# EAGLE board sensor (EAGLE 8.5.0)
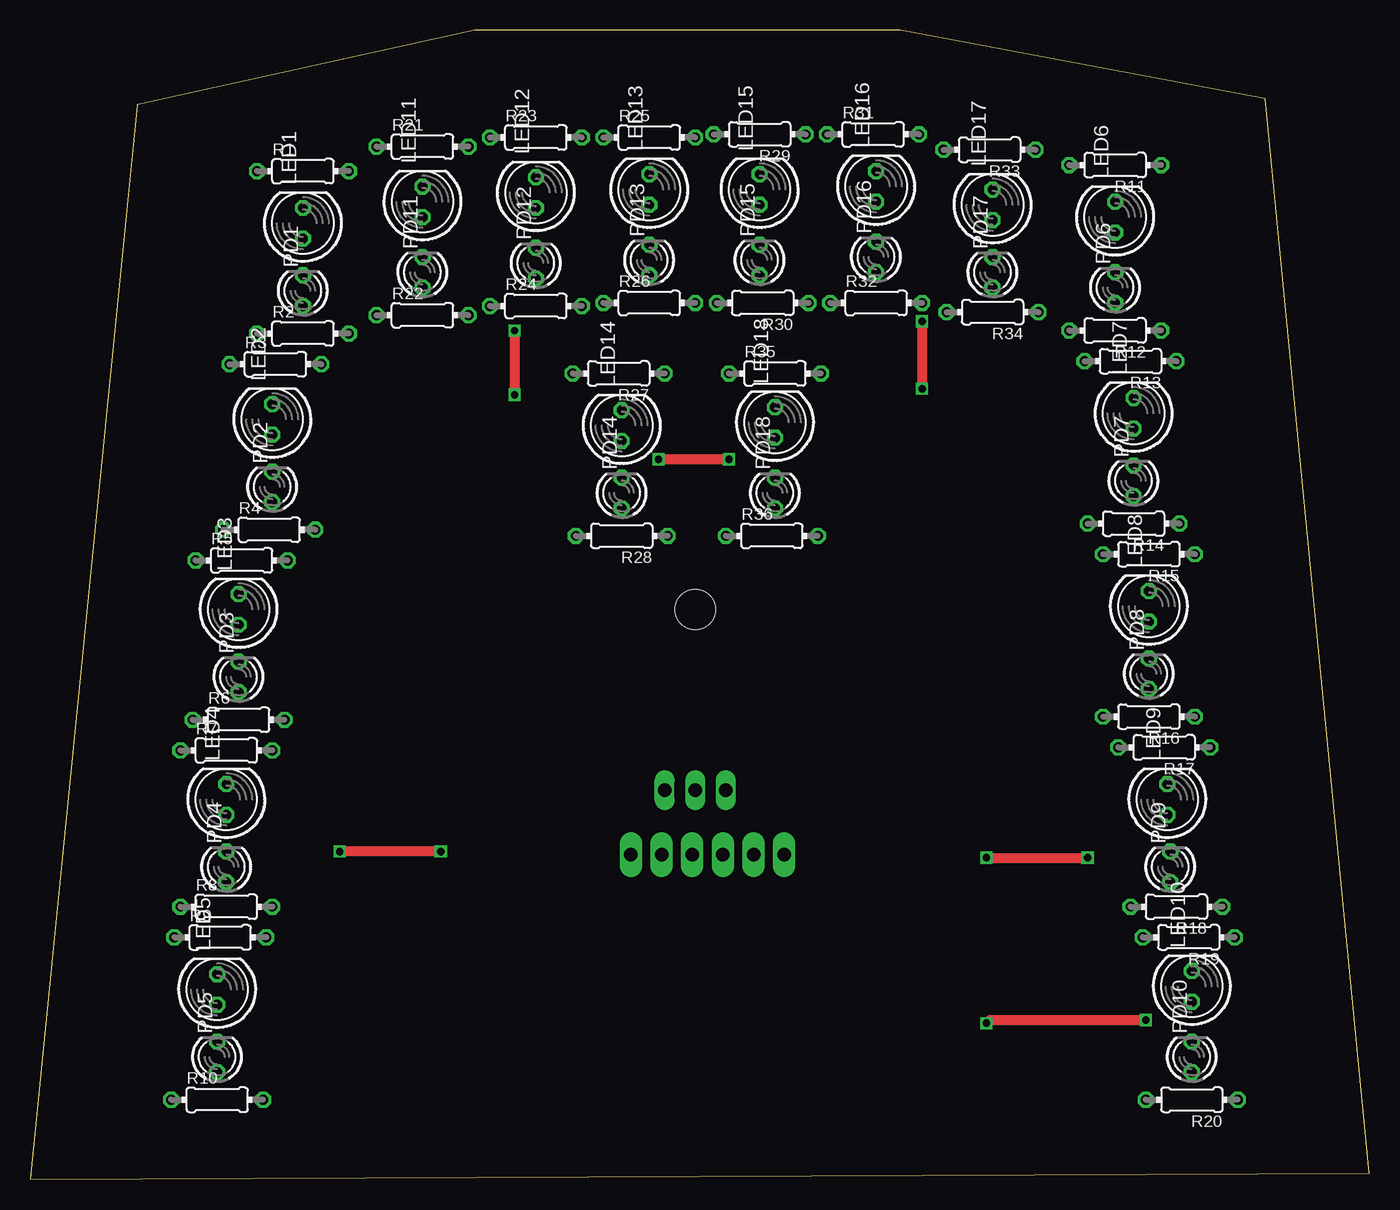
[diagram p0: board, top side]
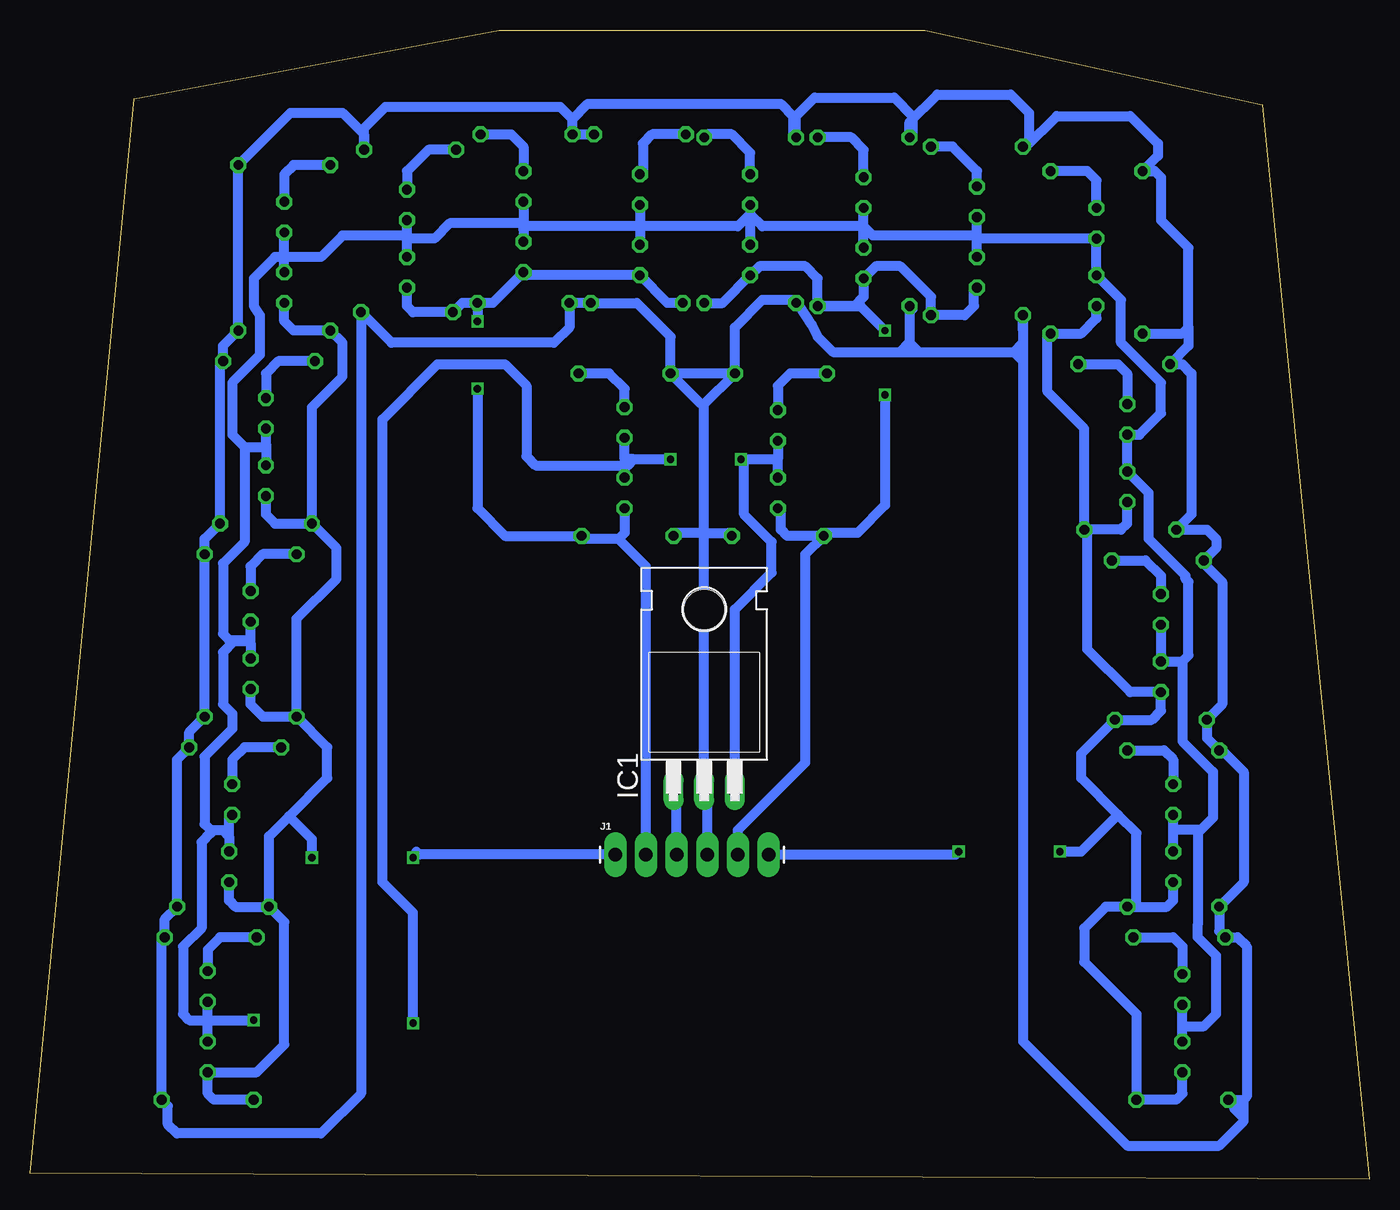
[diagram p1: board, bottom side, seen from below]

Size 110.98 x 95.25 mm. Coordinates in mm from the lower left corner, seen from the top.
Outline: 0,0 110.98,0.51 102.34,89.59 72.14,95.25 36.83,95.25 8.89,89.08 0,0
Copper layers (1*16): Top 0.035mm / dielectric 1.5mm / Bottom 0.035mm
Design rules "default": minimum track width 6mil, minimum drill 0.35mm, track to track 6mil, track to pad 6mil, pad to pad 6mil, via to via 6mil, smd to smd 6mil, copper to edge 40mil, drill to drill 6mil, minimum pad ring 10mil, minimum via ring 8mil, stop-mask expansion 4mil, vias tented up to drill 0mil, thermal gap 10mil

## Footprints (pad centres in the part's own frame; a part is rotated, then mirrored left to right if it is on the bottom)
TO220H = drill 1.118 long: 1 -2.54,-10.16; 2 0,-10.16; 3 2.54,-10.16 | hole 3.302: 0,4.826
1X06_LONGPADS = drill 1.118 pad 1.88 long: 1 0,0; 2 2.54,0; 3 5.08,0; 4 7.62,0; 5 10.16,0; 6 12.7,0
LED5MM = drill 0.813 octagon: A -1.27,0; K 1.27,0
LED3MM = drill 0.813 octagon: A -1.27,0; K 1.27,0
0204/7 = drill 0.813 octagon: 1 -3.81,0; 2 3.81,0

## Placement (x,y rotation side)
IC1  7805T  [TO220H]  55.12,42.42 0 bottom
J1  [1X06_LONGPADS]  62.48,26.92 0 bottom
LED1  [LED5MM]  22.61,79.25 90 top
LED2  [LED5MM]  20.07,62.99 90 top
LED3  [LED5MM]  17.27,47.24 90 top
LED4  [LED5MM]  16.26,31.5 90 top
LED5  [LED5MM]  15.49,15.75 90 top
LED6  [LED5MM]  89.92,79.76 90 top
LED7  [LED5MM]  91.44,63.5 90 top
LED8  [LED5MM]  92.71,47.5 90 top
LED9  [LED5MM]  94.23,31.5 90 top
LED10  [LED5MM]  96.27,16 90 top
LED11  [LED5MM]  32.51,81.03 90 top
LED12  [LED5MM]  41.91,81.79 90 top
LED13  [LED5MM]  51.31,82.04 90 top
LED14  [LED5MM]  49.02,62.48 90 top
LED15  [LED5MM]  60.45,82.04 90 top
LED16  [LED5MM]  70.1,82.3 90 top
LED17  [LED5MM]  79.76,80.77 90 top
LED18  [LED5MM]  61.72,62.74 90 top
PD1  [LED3MM]  22.61,73.66 90 top
PD2  [LED3MM]  20.07,57.4 90 top
PD3  [LED3MM]  17.27,41.66 90 top
PD4  [LED3MM]  16.26,25.91 90 top
PD5  [LED3MM]  15.49,10.16 90 top
PD6  [LED3MM]  89.92,73.91 90 top
PD7  [LED3MM]  91.44,57.91 90 top
PD8  [LED3MM]  92.71,41.91 90 top
PD9  [LED3MM]  94.49,25.91 90 top
PD10  [LED3MM]  96.27,10.16 90 top
PD11  [LED3MM]  32.51,75.18 90 top
PD12  [LED3MM]  41.91,75.95 90 top
PD13  [LED3MM]  51.31,76.2 90 top
PD14  [LED3MM]  49.02,56.9 90 top
PD15  [LED3MM]  60.45,76.2 90 top
PD16  [LED3MM]  70.1,76.45 90 top
PD17  [LED3MM]  79.76,75.18 90 top
PD18  [LED3MM]  61.72,56.9 90 top
R1  [0204/7]  22.61,83.57 0 top
R2  [0204/7]  22.61,70.1 0 top
R3  [0204/7]  20.32,67.56 0 top
R4  [0204/7]  19.81,53.85 0 top
R5  [0204/7]  17.53,51.31 0 top
R6  [0204/7]  17.27,38.1 0 top
R7  [0204/7]  16.26,35.56 0 top
R8  [0204/7]  16.26,22.61 0 top
R9  [0204/7]  15.75,20.07 0 top
R10  [0204/7]  15.49,6.6 0 top
R11  [0204/7]  89.92,84.07 180 top
R12  [0204/7]  89.92,70.36 180 top
R13  [0204/7]  91.19,67.82 180 top
R14  [0204/7]  91.44,54.36 180 top
R15  [0204/7]  92.71,51.82 180 top
R16  [0204/7]  92.71,38.35 180 top
R17  [0204/7]  93.98,35.81 180 top
R18  [0204/7]  95,22.61 180 top
R19  [0204/7]  96.01,20.07 180 top
R20  [0204/7]  96.27,6.6 180 top
R21  [0204/7]  32.51,85.6 0 top
R22  [0204/7]  32.51,71.63 0 top
R23  [0204/7]  41.91,86.36 0 top
R24  [0204/7]  41.91,72.39 0 top
R25  [0204/7]  51.31,86.36 0 top
R26  [0204/7]  51.31,72.64 0 top
R27  [0204/7]  48.77,66.8 180 top
R28  [0204/7]  49.02,53.34 180 top
R29  [0204/7]  60.45,86.61 180 top
R30  [0204/7]  60.71,72.64 180 top
R31  [0204/7]  69.85,86.61 0 top
R32  [0204/7]  70.1,72.64 0 top
R33  [0204/7]  79.5,85.34 180 top
R34  [0204/7]  79.76,71.88 180 top
R35  [0204/7]  61.72,66.8 0 top
R36  [0204/7]  61.47,53.34 0 top

## Library data of the parts
IC1 = linear
J1 = SparkFun-Connectors
LED1-LED18 PD1-PD18 = led
R1-R36 = resistor

## Nets
GND: IC1.2 J1.4 R1.1 R2.1 R3.1 R4.1 R5.1 R6.1 R7.1 R8.1 R9.1 R10.1 R11.1 R12.1 R13.1 R14.1 R15.1 R16.1 R17.1 R18.1 R19.1 R20.1 R21.1 R22.1 R23.1 R24.1 R25.1 R26.1 R27.1 R28.1 R29.1 R30.1 R31.1 R32.1 R33.1 R34.1 R35.1 R36.1
KA: J1.2 PD15.A PD16.A PD17.A PD18.A R30.2 R32.2 R34.2 R36.2
KI: J1.5 PD11.A PD12.A PD13.A PD14.A R22.2 R24.2 R26.2 R28.2
N$1: LED1.K R1.2
N$2: LED6.K R11.2
N$3: LED2.K R3.2
N$4: LED7.K R13.2
N$5: LED3.K R5.2
N$6: LED8.K R15.2
N$7: LED4.K R7.2
N$8: LED9.K R17.2
N$9: LED5.K R9.2
N$11: LED10.K R19.2
N$13: LED11.K R21.2
N$14: LED12.K R23.2
N$15: LED13.K R25.2
N$16: LED14.K R27.2
N$18: LED15.K R29.2
N$19: LED16.K R31.2
N$20: LED17.K R33.2
N$21: LED18.K R35.2
SKA: J1.1 PD6.A PD7.A PD8.A PD9.A PD10.A R12.2 R14.2 R16.2 R18.2 R20.2
SKI: J1.6 PD1.A PD2.A PD3.A PD4.A PD5.A R2.2 R4.2 R6.2 R8.2 R10.2
VCC: IC1.3 LED1.A LED2.A LED3.A LED4.A LED5.A LED6.A LED7.A LED8.A LED9.A LED10.A LED11.A LED12.A LED13.A LED14.A LED15.A LED16.A LED17.A LED18.A PD1.K PD2.K PD3.K PD4.K PD5.K PD6.K PD7.K PD8.K PD9.K PD10.K PD11.K PD12.K PD13.K PD14.K PD15.K PD16.K PD17.K PD18.K
VIN: IC1.1 J1.3

## Tracks (layer width: path | path; a pad name or v marks a point on that pad's centre or on a via)
GND
  Bottom 0.813: 55.12,53.59 55.12,64.26 | 55.12,64.26 R27.1 | 55.12,64.26 55.37,64.26 R35.1 | 55.12,53.59 53.09,53.59 R28.1 | 55.12,53.59 57.4,53.59 R36.1 | R27.1 R35.1 | R27.1 52.58,70.61 50.29,72.9 47.75,72.9 R26.1 47.24,72.39 46.23,70.87 45.72,69.85 44.45,68.58 38.86,68.58 | R35.1 57.91,69.85 60.71,72.64 R30.1 R32.1 66.29,70.61 67.56,69.34 81.03,69.34 R34.1 83.57,7.11 86.87,3.81 98.81,3.81 99.57,4.57 99.57,6.1 R20.1 100.08,19.81 R19.1 99.82,21.59 R18.1 98.81,34.8 R17.1 97.79,37.08 R16.1 R15.1 96.52,53.09 R14.1 95.25,67.56 R13.1 95,69.09 R12.1 R11.1 89.41,88.39 85.09,88.39 83.31,86.61 R33.1 83.31,87.12 81.53,88.9 67.06,88.9 66.04,87.88 | R29.1 R31.1 66.04,87.88 | 66.04,87.88 64.77,89.15 48.77,89.15 47.75,88.14 47.75,86.61 R25.1 47.5,88.14 45.97,89.66 39.37,89.66 37.85,88.14 37.85,86.61 R23.1 38.1,87.63 35.81,89.92 29.72,89.92 28.19,88.39 28.19,86.11 R21.1 28.45,85.6 25.91,88.14 19.81,88.14 17.53,85.85 17.53,84.84 R1.1 17.78,83.57 17.27,83.06 17.27,79.5 14.99,77.22 14.99,70.61 | 14.99,70.61 14.99,69.09 R3.1 15.49,67.56 14.73,66.8 14.73,55.12 R4.1 13.46,53.85 12.7,53.09 12.7,52.32 R5.1 13.72,51.05 12.19,49.53 12.19,39.37 R6.1 13.46,36.58 R7.1 12.19,35.56 10.41,33.78 10.41,24.64 R8.1 12.45,20.57 R9.1 10.92,20.07 10.16,19.3 10.16,6.86 10.41,6.6 | R2.1 15.49,70.1 14.99,70.61 | 10.41,6.6 R10.1 11.18,6.1 11.18,5.84 10.41,5.08 | 28.7,70.36 R22.1 28.7,69.34 | 37.85,72.14 R24.1 38.1,69.34 | 28.7,69.34 28.7,68.58 | 28.7,68.58 28.7,67.82 | 28.7,67.82 28.7,11.43 20.07,2.79 12.45,2.79 10.41,4.83 10.41,5.08 | J1.4 54.86,32 IC1.2 55.12,53.59 | 38.86,68.58 37.85,68.58
  Bottom 0.813: 37.85,68.58 37.34,68.58 | 37.34,68.58 29.46,68.58 | 29.46,68.58 28.7,68.58 | 38.1,69.34 38.1,68.83 37.85,68.58 | 29.46,68.58 28.7,69.34 | 29.46,68.58 28.7,67.82 | 38.1,69.34 37.34,68.58 | 38.1,69.34 38.86,68.58 | 10.41,5.08 10.41,6.6
KA  (via drill 0.6)
  Top 0.813: v73.91,71.12 v73.91,65.53
  Bottom 0.813: PD17.A 79.76,72.39 79.25,71.88 R34.2 75.18,72.64 R32.2 | R30.2 58.17,72.64 PD15.A 69.85,74.93 PD16.A 72.64,72.64 R32.2 | PD18.A 61.72,53.59 62.23,53.09 | 62.23,53.09 65.02,53.09 R36.2 71.63,53.34 73.91,55.63 v73.91,65.53 | R32.2 v73.91,71.12 | J1.2 59.94,50.8 62.23,53.09
KI  (via drill 0.6)
  Top 0.813: v40.13,70.36 v40.13,65.02
  Bottom 0.813: PD11.A 32.77,73.66 32.77,72.39 33.53,71.63 R22.2 36.32,73.15 38.86,75.69 40.89,75.69 PD12.A 41.91,73.15 42.67,72.39 R24.2 | R26.2 53.59,72.64 PD13.A 50.55,75.69 46.74,75.69 45.72,74.68 R24.2 | R28.2 48.26,53.34 48.77,53.85 48.77,55.37 PD14.A | R24.2 42.16,72.39 v40.13,70.36 | v40.13,65.02 40.13,55.88 42.42,53.59 44.96,53.59 R28.2 | J1.5 52.32,28.96 46.74,34.54 46.74,51.82 R28.2
N$1
  Bottom 0.813: LED1.K 22.61,82.8 23.37,83.57 R1.2
N$2
  Bottom 0.813: R11.2 89.15,84.07 89.92,83.31 LED6.K
N$3
  Bottom 0.813: R3.2 20.83,67.56 20.07,66.8 LED2.K
N$4
  Bottom 0.813: R13.2 90.42,67.82 91.44,66.8 LED7.K
N$5
  Bottom 0.813: R5.2 18.54,51.31 17.27,50.04 LED3.K
N$6
  Bottom 0.813: R15.2 91.69,51.82 92.71,50.8 LED8.K
N$7
  Bottom 0.813: R7.2 17.02,35.56 16.26,34.8 LED4.K
N$8
  Bottom 0.813: R17.2 93.22,35.81 94.23,34.8 LED9.K
N$9
  Bottom 0.813: R9.2 16.26,20.07 15.49,19.3 LED5.K
N$11
  Bottom 0.813: R19.2 95.25,20.07 96.27,19.05 LED10.K
N$13
  Bottom 0.813: LED11.K 32.51,83.57 34.54,85.6 R21.2
N$14
  Bottom 0.813: LED12.K 41.91,85.34 42.93,86.36 R23.2
N$15
  Bottom 0.813: LED13.K 51.31,85.09 52.83,86.61 54.86,86.61 R25.2
N$16
  Bottom 0.813: R27.2 48.01,66.8 49.02,65.79 LED14.K
N$18
  Bottom 0.813: R29.2 59.44,86.61 60.2,85.85 60.2,83.57 LED15.K
N$19
  Bottom 0.813: R31.2 71.12,86.61 70.1,85.6 LED16.K
N$20
  Bottom 0.813: R33.2 77.98,85.34 79.76,83.57 LED17.K
N$21
  Bottom 0.813: LED18.K 61.72,65.53 62.99,66.8 R35.2
SKA  (via drill 0.6)
  Top 0.813: v79.25,26.67 v87.63,26.67
  Bottom 0.813: R20.2 95.76,6.6 96.27,7.11 PD10.A 92.2,8.89 89.92,11.18 89.92,21.34 R18.2 | R18.2 93.98,22.61 94.49,23.11 PD9.A | R16.2 91.69,38.35 92.71,39.37 PD8.A | R14.2 90.68,54.36 91.44,55.12 PD7.A | PD6.A 89.92,71.12 89.15,70.36 R12.2 85.09,69.34 85.09,66.55 87.63,64.01 R14.2 | R18.2 91.19,28.45 89.54,30.1 | 89.54,30.1 86.36,33.27 86.36,35.81 R16.2 | R16.2 88.9,46.48 85.6,49.78 85.6,52.32 R14.2 | J1.1 78.74,26.92 78.99,27.18 78.99,26.92 v79.25,26.67 | v87.63,26.67 87.63,28.19 89.54,30.1
SKI  (via drill 0.6)
  Top 0.813: v34.04,27.18 v25.65,27.18
  Bottom 0.813: PD1.A 22.61,71.37 23.88,70.1 R2.2 26.67,69.85 26.67,65.28 23.62,62.23 R4.2 | R4.2 20.57,53.85 20.07,54.36 PD2.A | 19.3,22.61 R8.2 21.84,22.61 23.62,20.83 23.62,18.03 19.3,13.72 R10.2 16,6.6 15.49,7.11 PD5.A | 19.3,22.61 16.76,22.61 16.26,23.11 PD4.A | 19.3,22.61 19.3,28.7 20.83,30.23 | 20.83,30.23 23.88,33.27 23.88,35.31 R6.2 18.03,38.1 17.27,38.86 PD3.A 19.81,40.39 23.37,43.94 23.37,53.59 R4.2 | J1.6 34.29,26.92 v34.04,27.18 | v25.65,27.18 23.88,27.18 20.83,30.23
VCC  (via drill 0.6)
  Top 0.813: v52.07,59.69 v57.91,59.69 | v92.46,13.21 79.5,13.21 v79.25,12.95
  Bottom 0.813: LED3.A PD3.K 15.49,42.93 | PD11.K 32.51,78.23 | 32.51,78.23 LED11.A | PD12.K 41.91,78.99 | 41.91,78.99 LED12.A | 51.31,80.01 PD13.K | 60.45,78.99 PD15.K | 70.1,78.74 70.1,79.25 | 70.1,78.74 PD16.K | PD17.K 79.76,78.23 | 79.76,78.23 LED17.A | PD6.K 89.92,76.45 | 89.92,76.45 LED6.A | 91.44,60.96 PD7.K | 91.44,60.96 LED7.A | 92.71,44.45 PD8.K | 92.71,44.45 LED8.A | 94.49,28.45 PD9.K | 94.49,28.45 94.49,29.97 LED9.A | PD10.K 96.27,13.21 | 96.27,13.21 LED10.A | LED16.A 70.1,79.25 | LED15.A 60.45,78.99 | LED13.A 51.31,80.01 | 51.31,80.01 52.32,78.99 60.45,78.99 | 60.45,78.99 69.85,78.99 70.1,78.74 | 70.1,79.25 76.2,79.25 77.47,77.98 79.5,77.98 79.76,78.23 | 79.76,78.23 85.09,78.23 86.87,76.45 89.92,76.45 | 89.92,76.45 90.68,76.45 92.46,74.68 92.46,72.39 91.95,71.63 91.95,68.33 94.23,66.04 94.23,61.72 93.22,60.71 | 93.22,60.71 91.69,60.71 91.44,60.96 | 93.22,60.71 93.22,52.83 95,51.05 95,45.21 94.49,44.7 92.96,44.7 92.84,44.58 | 92.84,44.58 92.71,44.45 | 92.84,44.58 94.11,44.58 95,43.69 95,39.37 94.23,38.61 94.23,37.34 96.52,35.05 96.52,29.46 96.01,28.96 | 96.01,28.96 95,28.96 94.49,28.45 | 96.01,28.96 96.01,28.7 96.77,27.94 96.77,20.83 98.3,19.3 98.3,13.72 97.79,13.21 96.27,13.21 | 15.49,42.93 14.99,43.43 14.99,49.53 15.24,49.78 15.24,50.04 18.29,53.09 18.29,56.9 PD2.K LED2.A 19.05,61.72 17.27,63.5 17.27,66.04 20.57,69.34 20.57,72.9 PD1.K LED1.A 32.26,77.98 32.51,78.23 | 32.51,78.23 41.15,78.23 41.91,78.99 | 41.91,78.99 50.29,78.99 51.31,80.01 | PD14.K 49.02,59.69 | 61.72,59.69 PD18.K | 61.72,59.69 LED18.A | LED14.A 49.02,59.69 | 49.02,59.69 v52.07,59.69 51.82,59.44 51.82,55.12 49.53,52.83 49.53,50.29 52.58,47.24 IC1.3
  Bottom 0.813: 60.96,59.69 v57.91,59.69 | 60.96,59.69 61.72,59.69 | 96.27,13.21 v92.46,13.21 | v79.25,12.95 79.25,22.1 81.79,24.64 81.79,62.99 77.22,67.56 71.63,67.56 69.85,65.79 69.85,59.94 69.09,59.18 61.47,59.18 60.96,59.69 | PD5.K 15.49,12.7 | 15.49,12.7 LED5.A | PD4.K 16.26,28.96 | 16.26,28.96 LED4.A | 15.49,42.93 15.49,36.32 12.95,33.78 12.95,29.97 13.97,28.96 | 13.97,28.96 16.26,28.96 | 13.97,28.96 14.22,28.7 14.22,21.08 14.22,20.07 12.7,18.54 12.7,13.72 13.72,12.7 15.49,12.7
VIN
  Bottom 0.813: J1.3 57.4,32 IC1.1